# EAGLE board DO (EAGLE 9.5.0)
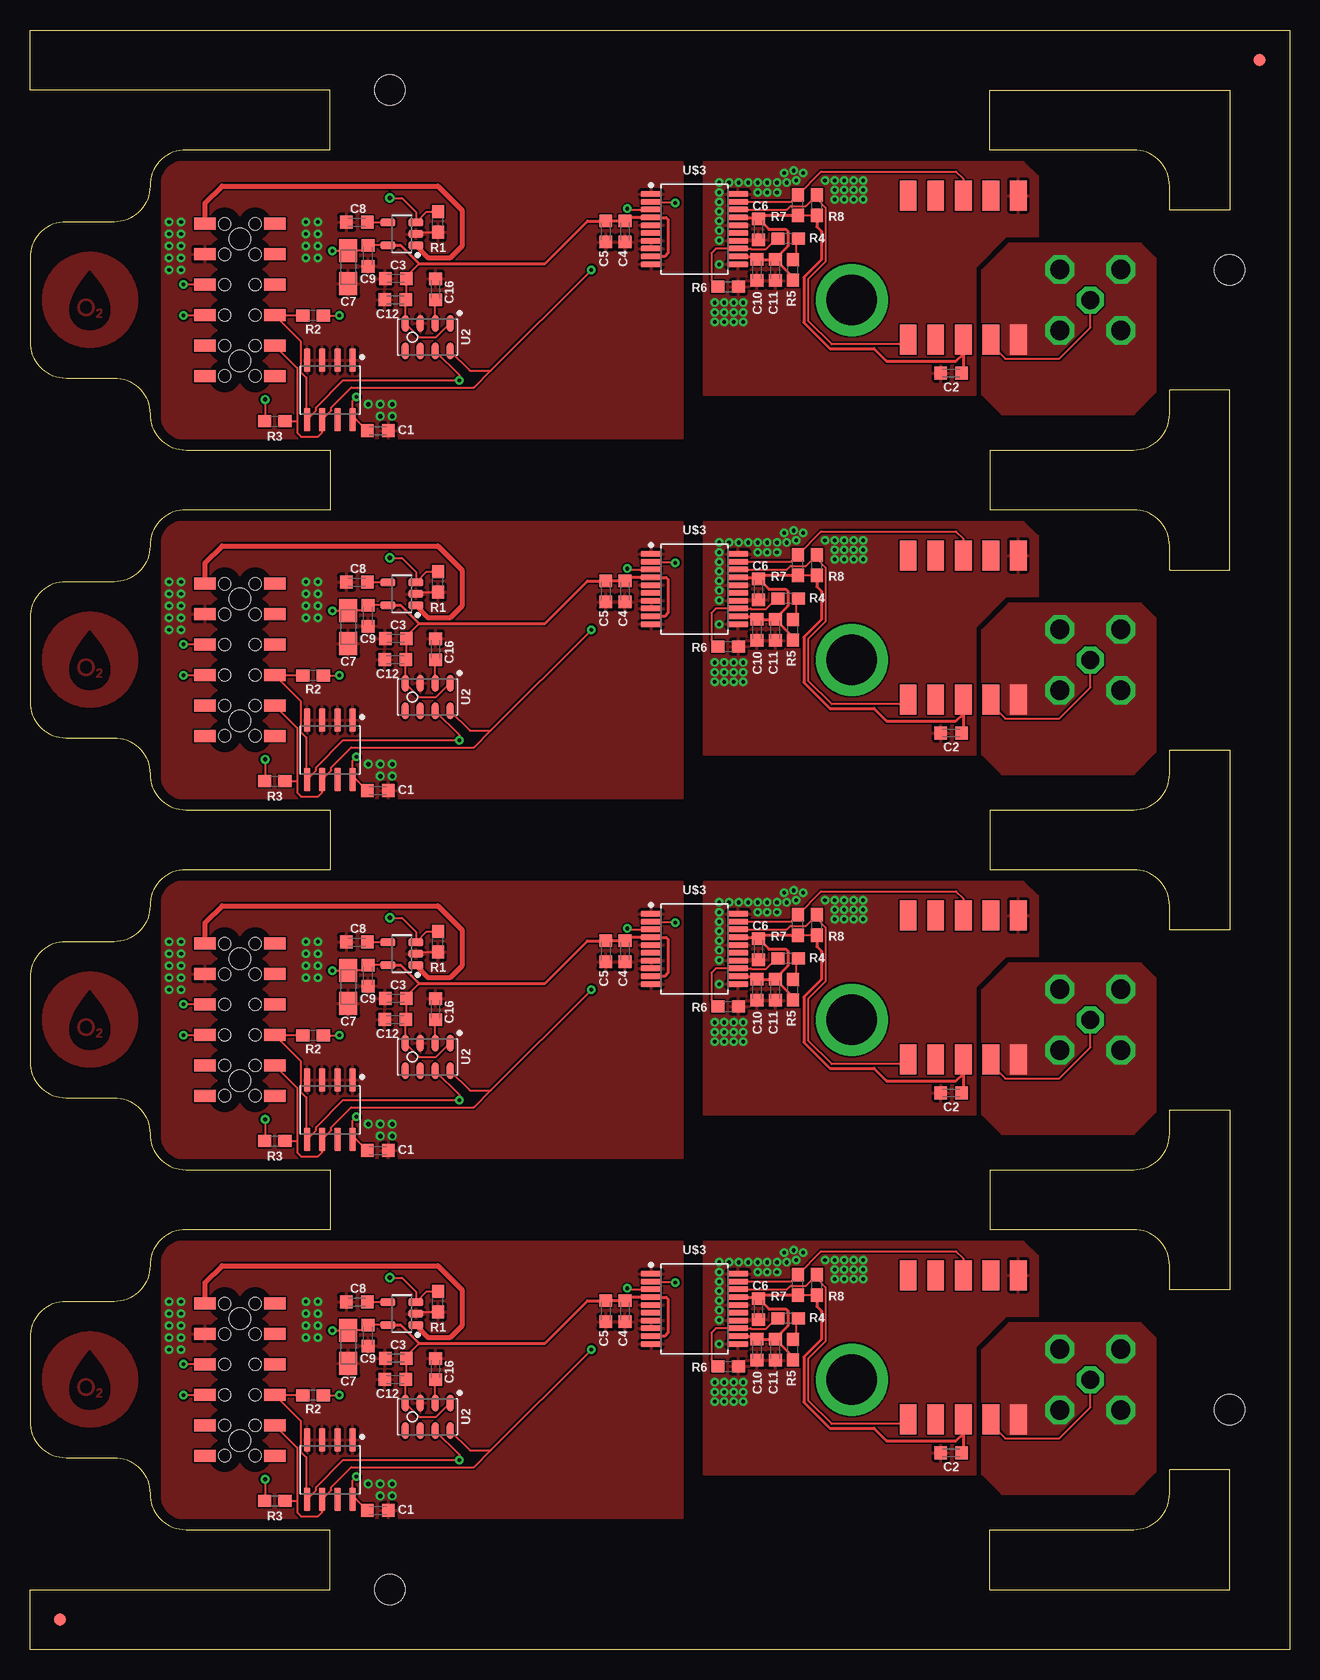
[diagram p0: board, top side]
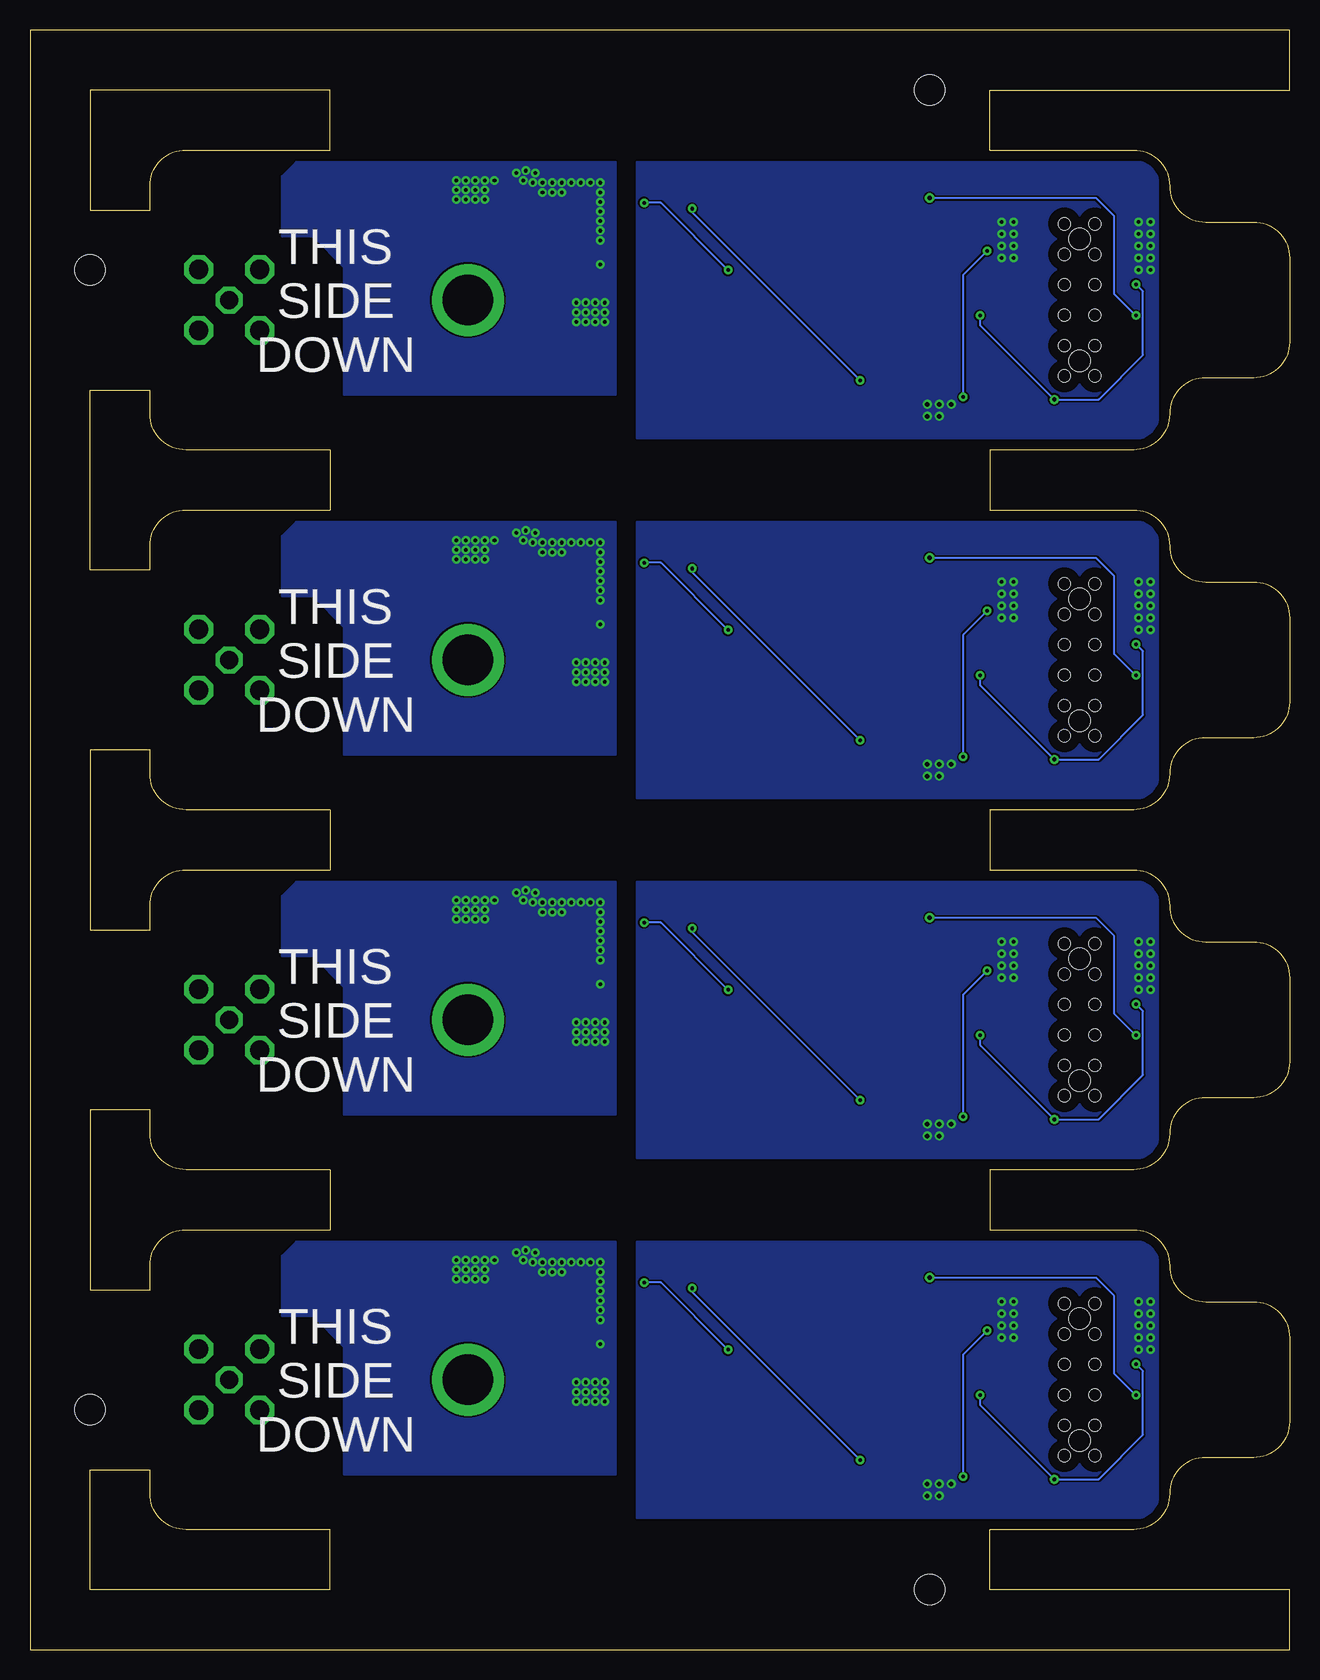
[diagram p1: board, bottom side, seen from below]

Size 105 x 135 mm. Coordinates in mm from the lower left corner, seen from the top.
Outline: 92,10 arc90 95,13 95,15 100,15 100,5 80,5 80,10 92,10
Outline: 95,32 arc90 92,35 80,35 80,40 92,40 arc90 95,43 95,45 100,45 100,30 95,30 95,32
Outline: 10,13 arc90 13,10 25,10 25,5 0,5 0,0 105,0 105,135 0,135 0,130 25,130 25,125 13,125 arc90 10,122 arc-90 7,119 3,119 arc90 0,116 0,109 arc90 3,106 7,106 arc-90 10,103 arc90 13,100 25,100 25,95 13,95 arc90 10,92 arc-90 7,89 3,89 arc90 0,86 0,79 arc90 3,76 7,76 arc-90 10,73 arc90 13,70 25,70 25,65 13,65 arc90 10,62 arc-90 7,59 3,59 arc90 0,56 0,49 arc90 3,46 7,46 arc-90 10,43 arc90 13,40 25,40 25,35 13,35 arc90 10,32 arc-90 7,29 3,29 arc90 0,26 0,19 arc90 3,16 7,16 arc-90 10,13
Outline: 95,62 arc90 92,65 80,65 80,70 92,70 arc90 95,73 95,75 100,75 100,60 95,60 95,62
Outline: 95,92 arc90 92,95 80,95 80,100 92,100 arc90 95,103 95,105 100,105 100,90 95,90 95,92
Outline: 95,122 arc90 92,125 80,125 80,130 100,130 100,120 95,120 95,122
Copper layers (1*16): Top 0.035mm / dielectric 1.5mm / Bottom 0.035mm
Design rules "default *": minimum track width 6mil, minimum drill 0.35mm, track to track 6mil, track to pad 6mil, pad to pad 6mil, via to via 6mil, smd to smd 6mil, copper to edge 32mil, drill to drill 6mil, minimum pad ring 10mil, minimum via ring 8mil, stop-mask expansion 4mil, vias tented up to drill 0.35mm, thermal gap 10mil
Holes 2.54 mm at 30,5 100,20 100,115 30,130

## Footprints (pad centres in the part's own frame; a part is rotated, then mirrored left to right if it is on the bottom)
C0603K = smd 1.05 x 1.08: 1 -0.875,0; 2 0.875,0
A/3216-18R = smd 1.95 x 1.5: + 1.375,0; - -1.375,0
FIDUCIAL_1MM = smd 1 x 1: 1 0,0
M20-7810645 = smd 1.02 x 1.78: P$1 -6.35,-2.91; P$2 -3.81,-2.91; P$3 -1.27,-2.91; P$4 1.27,-2.91; P$5 3.81,-2.91; P$6 6.35,-2.91; P$7 6.35,2.91; P$8 3.81,2.91; P$9 1.27,2.91; P$10 -1.27,2.91; P$11 -3.81,2.91; P$12 -6.35,2.91 | hole 1.02: -6.35,1.27; -3.81,1.27; -1.27,1.27; 1.27,1.27; 3.81,1.27; 6.35,1.27; 6.35,-1.27; 3.81,-1.27; 1.27,-1.27; -1.27,-1.27; -3.81,-1.27; -6.35,-1.27 | hole 1.8: -5.08,0; 5.08,0
0603 = smd 1.1 x 1: 1 -0.85,0; 2 0.85,0
SOIC127P600X175-8 = smd 1.968 x 0.569: 1 -2.473,1.905; 2 -2.473,0.635; 3 -2.473,-0.635; 4 -2.473,-1.905; 5 2.473,-1.905; 6 2.473,-0.635; 7 2.473,0.635; 8 2.473,1.905
SON125P300X500X110-8 = smd 1.412 x 0.582: 1 -1.15,1.875; 2 -1.15,0.625; 3 -1.15,-0.625; 4 -1.15,-1.875; 5 1.15,-1.875; 6 1.15,-0.625; 7 1.15,0.625; 8 1.15,1.875
5-1814832-1 = drill 1.6 octagon: G1 -2.54,2.54; G2 -2.54,-2.54; G3 2.54,-2.54; G4 2.54,2.54 | drill 1.5 octagon: PIN 0,0
ATLAS-10P = smd 2.5 x 1.4: PAD1 -6,5; PAD2 -6,2.7; PAD3 -6,0.4; PAD4 -6,-1.9; PAD5 -6,-4.2; PAD6 6,-4.2; PAD7 6,-1.9; PAD8 6,0.4; PAD9 6,2.7; PAD10 6,5
SOP65P780X200-20 = smd 1.702 x 0.475: 1 -3.603,2.925; 2 -3.603,2.275; 3 -3.603,1.625; 4 -3.603,0.975; 5 -3.603,0.325; 6 -3.603,-0.325; 7 -3.603,-0.975; 8 -3.603,-1.625; 9 -3.603,-2.275; 10 -3.603,-2.925; 11 3.603,-2.925; 12 3.603,-2.275; 13 3.603,-1.625; 14 3.603,-0.975; 15 3.603,-0.325; 16 3.603,0.325; 17 3.603,0.975; 18 3.603,1.625; 19 3.603,2.275; 20 3.603,2.925
SOT95P280X145-5 = smd 1.262 x 0.609: 1 -1.175,0.95; 2 -1.175,0; 3 -1.175,-0.95; 4 1.175,-0.95; 5 1.175,0.95

## Placement (x,y rotation side)
C1  .1uf  [C0603K]  29,101.6 0 top
C2  .1uf  [C0603K]  76.8,106.4 180 top
C3  10uf  [C0603K]  30.49,114.28 180 top
C4  .1uf  [C0603K]  49.6,118.2 270 top
C5  10uf  [C0603K]  48,118.2 270 top
C6  .1uf  [C0603K]  60.73,118.38 270 top
C7  6.8uf  [A/3216-18R]  26.54,115.23 90 top
C8  [C0603K]  27.25,118.97 180 top
C9  .1uf  [C0603K]  28.17,116.17 270 top
C10  .1uf  [C0603K]  60.6,115 270 top
C11  10uf  [C0603K]  62.13,115 270 top
C12  .1uf  [C0603K]  30.45,112.51 180 top
C13  6.8uf  [A/3216-18R]  26.54,85.23 90 top
C14  [C0603K]  27.25,88.97 180 top
C15  .1uf  [C0603K]  28.17,86.17 270 top
C16  .1uf  [C0603K]  33.81,113.38 90 top
C17  .1uf  [C0603K]  29,71.6 0 top
C18  .1uf  [C0603K]  76.8,76.4 180 top
C19  .1uf  [C0603K]  49.6,88.2 270 top
C20  10uf  [C0603K]  48,88.2 270 top
C21  .1uf  [C0603K]  60.73,88.38 270 top
C22  .1uf  [C0603K]  60.6,85 270 top
C23  10uf  [C0603K]  62.13,85 270 top
C24  10uf  [C0603K]  30.49,84.28 180 top
C25  .1uf  [C0603K]  30.45,82.51 180 top
C26  .1uf  [C0603K]  33.81,83.38 90 top
C27  6.8uf  [A/3216-18R]  26.54,55.23 90 top
C28  [C0603K]  27.25,58.97 180 top
C29  .1uf  [C0603K]  28.17,56.17 270 top
C30  .1uf  [C0603K]  29,41.6 0 top
C31  .1uf  [C0603K]  76.8,46.4 180 top
C32  .1uf  [C0603K]  49.6,58.2 270 top
C33  10uf  [C0603K]  48,58.2 270 top
C34  .1uf  [C0603K]  60.73,58.38 270 top
C35  .1uf  [C0603K]  60.6,55 270 top
C36  10uf  [C0603K]  62.13,55 270 top
C37  10uf  [C0603K]  30.49,54.28 180 top
C38  .1uf  [C0603K]  30.45,52.51 180 top
C39  .1uf  [C0603K]  33.81,53.38 90 top
C40  6.8uf  [A/3216-18R]  26.54,25.23 90 top
C41  [C0603K]  27.25,28.97 180 top
C42  .1uf  [C0603K]  28.17,26.18 270 top
C43  .1uf  [C0603K]  29,11.6 0 top
C44  .1uf  [C0603K]  76.8,16.4 180 top
C45  .1uf  [C0603K]  49.6,28.2 270 top
C46  10uf  [C0603K]  48,28.2 270 top
C47  .1uf  [C0603K]  60.73,28.38 270 top
C48  .1uf  [C0603K]  60.6,25 270 top
C49  10uf  [C0603K]  62.13,25 270 top
C50  10uf  [C0603K]  30.49,24.29 180 top
C51  .1uf  [C0603K]  30.45,22.51 180 top
C52  .1uf  [C0603K]  33.81,23.38 90 top
FID1  FIDUCIAL_1MM  [FIDUCIAL_1MM]  102.5,132.5 0 top
FID13  FIDUCIAL_1MM  [FIDUCIAL_1MM]  2.5,2.5 0 top
J1  2X6-HEADERS  [M20-7810645]  17.5,112.5 90 top
J2  2X6-HEADERS  [M20-7810645]  17.5,82.5 90 top
J3  2X6-HEADERS  [M20-7810645]  17.5,52.5 90 top
J4  2X6-HEADERS  [M20-7810645]  17.5,22.5 90 top
R1  100k  [0603]  34,119 90 top
R2  4.7k  [0603]  23.6,111.2 180 top
R3  4.7k  [0603]  20.4,102.4 0 top
R4  1.5k  [0603]  63.2,117.6 180 top
R5  1.5k  [0603]  63.6,115 90 top
R6  1.5k  [0603]  58.2,113.6 0 top
R7  4.7k  [0603]  64,120.4 90 top
R8  4.7k  [0603]  65.6,120.4 90 top
R9  100k  [0603]  34,89 90 top
R10  4.7k  [0603]  23.6,81.2 180 top
R11  4.7k  [0603]  20.4,72.4 0 top
R12  1.5k  [0603]  63.2,87.6 180 top
R13  1.5k  [0603]  63.6,85 90 top
R14  1.5k  [0603]  58.2,83.6 0 top
R15  4.7k  [0603]  64,90.4 90 top
R16  4.7k  [0603]  65.6,90.4 90 top
R17  100k  [0603]  34,59 90 top
R18  4.7k  [0603]  23.6,51.2 180 top
R19  4.7k  [0603]  20.4,42.4 0 top
R20  1.5k  [0603]  63.2,57.6 180 top
R21  1.5k  [0603]  63.6,55 90 top
R22  1.5k  [0603]  58.2,53.6 0 top
R23  4.7k  [0603]  64,60.4 90 top
R24  4.7k  [0603]  65.6,60.4 90 top
R25  100k  [0603]  34,29 90 top
R26  4.7k  [0603]  23.6,21.2 180 top
R27  4.7k  [0603]  20.4,12.4 0 top
R28  1.5k  [0603]  63.2,27.6 180 top
R29  1.5k  [0603]  63.6,25 90 top
R30  1.5k  [0603]  58.2,23.6 0 top
R31  4.7k  [0603]  64,30.4 90 top
R32  4.7k  [0603]  65.6,30.4 90 top
U1  M24C02-WMN6TP  [SOIC127P600X175-8]  25,75 270 top
U2  MPL3115A2LGA8  [SON125P300X500X110-8]  33.15,109.4 270 top
U3  M24C02-WMN6TP  [SOIC127P600X175-8]  25,105 270 top
U4  MPL3115A2LGA8  [SON125P300X500X110-8]  33.15,79.4 270 top
U5  M24C02-WMN6TP  [SOIC127P600X175-8]  25,45 270 top
U6  MPL3115A2LGA8  [SON125P300X500X110-8]  33.15,49.4 270 top
U7  M24C02-WMN6TP  [SOIC127P600X175-8]  25,15 270 top
U8  MPL3115A2LGA8  [SON125P300X500X110-8]  33.15,19.4 270 top
U$1  5-1814832-1  [5-1814832-1]  88.4,112.5 0 top
U$2  ATLAS10P  [ATLAS-10P]  78.2,115.2 90 top
U$3  ADM3260  [SOP65P780X200-20]  55.4,118.4 0 top
U$4  MIC5219-3.3YM5-TR  [SOT95P280X145-5]  31,118 180 top
U$5  MIC5219-3.3YM5-TR  [SOT95P280X145-5]  31,88 180 top
U$6  5-1814832-1  [5-1814832-1]  88.4,82.5 0 top
U$7  ATLAS10P  [ATLAS-10P]  78.2,85.2 90 top
U$8  ADM3260  [SOP65P780X200-20]  55.4,88.4 0 top
U$9  MIC5219-3.3YM5-TR  [SOT95P280X145-5]  31,58 180 top
U$10  5-1814832-1  [5-1814832-1]  88.4,52.5 0 top
U$11  ATLAS10P  [ATLAS-10P]  78.2,55.2 90 top
U$12  ADM3260  [SOP65P780X200-20]  55.4,58.4 0 top
U$13  MIC5219-3.3YM5-TR  [SOT95P280X145-5]  31,28 180 top
U$14  5-1814832-1  [5-1814832-1]  88.4,22.5 0 top
U$15  ATLAS10P  [ATLAS-10P]  78.2,25.2 90 top
U$16  ADM3260  [SOP65P780X200-20]  55.4,28.4 0 top

## Library data of the parts
C1-C52 = rcl; SPICEPREFIX: C
FID1 FID13 = microbuilder; BOM: EXCLUDE
J1-J4 U1-U8 U$1-U$16 = Conservify
R1-R32 = SparkFun-Resistors; PROD_ID: RES-07828

## Nets
3V1: C13.+ C15.1 C17.1 C19.1 C20.1 C24.1 C25.1 U1.8 U4.1 U4.4 U$5.5 U$8.4 U$8.9
3V2: C27.+ C29.1 C30.1 C32.1 C33.1 C37.1 C38.1 U5.8 U6.1 U6.4 U$9.5 U$12.4 U$12.9
3V3: C1.1 C3.1 C4.1 C5.1 C7.+ C9.1 C12.1 U2.1 U2.4 U3.8 U$3.4 U$3.9 U$4.5
3V4: C40.+ C42.1 C43.1 C45.1 C46.1 C50.1 C51.1 U7.8 U8.1 U8.4 U$13.5 U$16.4 U$16.9
CAP: C16.1 U2.2
CAP1: C26.1 U4.2
CAP2: C39.1 U6.2
CAP3: C52.1 U8.2
ENABLE: J1.P$10 R1.2 U$4.3
ENABLE1: J2.P$10 R9.2 U$5.3
ENABLE2: J3.P$10 R17.2 U$9.3
ENABLE3: J4.P$10 R25.2 U$13.3
G1: J1.P$11
G2: J1.P$12
G3: J2.P$11
G4: J2.P$12
G5: J3.P$11
G6: J3.P$12
G7: J4.P$11
G8: J4.P$12
GND: C1.2 C3.2 C4.2 C5.2 C7.- C8.2 C9.2 C12.2 C16.2 J1.P$8 R1.1 U2.3 U3.1 U3.2 U3.3 U3.4 U$3.1 U$3.5 U$3.7 U$3.8 U$3.10 U$4.2
GND2: C13.- C14.2 C15.2 C17.2 C19.2 C20.2 C24.2 C25.2 C26.2 J2.P$8 R9.1 U1.1 U1.2 U1.3 U1.4 U4.3 U$5.2 U$8.1 U$8.5 U$8.7 U$8.8 U$8.10
GND4: C27.- C28.2 C29.2 C30.2 C32.2 C33.2 C37.2 C38.2 C39.2 J3.P$8 R17.1 U5.1 U5.2 U5.3 U5.4 U6.3 U$9.2 U$12.1 U$12.5 U$12.7 U$12.8 U$12.10
GND6: C40.- C41.2 C42.2 C43.2 C45.2 C46.2 C50.2 C51.2 C52.2 J4.P$8 R25.1 U7.1 U7.2 U7.3 U7.4 U8.3 U$13.2 U$16.1 U$16.5 U$16.7 U$16.8 U$16.10
I3V1: C18.1 C21.1 C22.1 C23.1 R13.1 R15.1 R16.1 U$7.PAD3 U$8.12 U$8.17
I3V2: C31.1 C34.1 C35.1 C36.1 R21.1 R23.1 R24.1 U$11.PAD3 U$12.12 U$12.17
I3V3: C2.1 C6.1 C10.1 C11.1 R5.1 R7.1 R8.1 U$2.PAD3 U$3.12 U$3.17
I3V4: C44.1 C47.1 C48.1 C49.1 R29.1 R31.1 R32.1 U$15.PAD3 U$16.12 U$16.17
IGND: C2.2 C6.2 C10.2 C11.2 R6.2 U$2.PAD6 U$3.11 U$3.14 U$3.16 U$3.20
IGND1: C18.2 C21.2 C22.2 C23.2 R14.2 U$7.PAD6 U$8.11 U$8.14 U$8.16 U$8.20
IGND2: C31.2 C34.2 C35.2 C36.2 R22.2 U$11.PAD6 U$12.11 U$12.14 U$12.16 U$12.20
IGND3: C44.2 C47.2 C48.2 C49.2 R30.2 U$15.PAD6 U$16.11 U$16.14 U$16.16 U$16.20
IN3V1: J2.P$9 R10.1 R11.1
IN3V2: J3.P$9 R18.1 R19.1
IN3V3: J1.P$9 R2.1 R3.1
IN3V4: J4.P$9 R26.1 R27.1
ISCL: R7.2 U$2.PAD8 U$3.19
ISCL1: R15.2 U$7.PAD8 U$8.19
ISCL2: R23.2 U$11.PAD8 U$12.19
ISCL3: R31.2 U$15.PAD8 U$16.19
ISDA: R8.2 U$2.PAD1 U$3.18
ISDA1: R16.2 U$7.PAD1 U$8.18
ISDA2: R24.2 U$11.PAD1 U$12.18
ISDA3: R32.2 U$15.PAD1 U$16.18
MISO: J1.P$4
MISO1: J2.P$4
MISO2: J3.P$4
MISO3: J4.P$4
MOSI: J1.P$5
MOSI1: J2.P$5
MOSI2: J3.P$5
MOSI3: J4.P$5
N$2: U$1.PIN U$2.PAD4
N$3: R4.1 R5.2
N$5: C14.1 U$5.4
N$6: C8.1 U$4.4
N$7: U$6.PIN U$7.PAD4
N$8: R12.1 R13.2
N$10: C28.1 U$9.4
N$11: U$10.PIN U$11.PAD4
N$12: R20.1 R21.2
N$14: C41.1 U$13.4
N$15: U$14.PIN U$15.PAD4
N$16: R28.1 R29.2
NC: J1.P$1
NC1: J2.P$1
NC2: J3.P$1
NC3: J4.P$1
PG: U$1.G1 U$1.G2 U$1.G3 U$1.G4 U$2.PAD5
PG1: U$6.G1 U$6.G2 U$6.G3 U$6.G4 U$7.PAD5
PG2: U$10.G1 U$10.G2 U$10.G3 U$10.G4 U$11.PAD5
PG3: U$14.G1 U$14.G2 U$14.G3 U$14.G4 U$15.PAD5
SCK: J1.P$6
SCK1: J2.P$6
SCK2: J3.P$6
SCK3: J4.P$6
SCL: J1.P$2 R3.2 U2.8 U3.6 U$3.2
SCL1: J2.P$2 R11.2 U1.6 U4.8 U$8.2
SCL2: J3.P$2 R19.2 U5.6 U6.8 U$12.2
SCL3: J4.P$2 R27.2 U7.6 U8.8 U$16.2
SDA: J1.P$3 R2.2 U2.7 U3.5 U$3.3
SDA1: J2.P$3 R10.2 U1.5 U4.7 U$8.3
SDA2: J3.P$3 R18.2 U5.5 U6.7 U$12.3
SDA3: J4.P$3 R26.2 U7.5 U8.7 U$16.3
UNREG: J1.P$7 U$4.1
UNREG1: J2.P$7 U$5.1
UNREG2: J3.P$7 U$9.1
UNREG3: J4.P$7 U$13.1
VSEL: R4.2 R6.1 U$3.13
VSEL1: R12.2 R14.1 U$8.13
VSEL2: R20.2 R22.1 U$12.13
VSEL3: R28.2 R30.1 U$16.13
WC: U3.7
WC1: U1.7
WC2: U5.7
WC3: U7.7

## Tracks (layer width: path | path; a pad name or v marks a point on that pad's centre or on a via)
3V1  (via drill 0.3)
  Top 0.152: 29.95,87.05 U$5.5 C15.1 27.73,86.61 C13.+ v25.21,86.61 v25.2,86.6 | C17.1 27.2,72.53 | 27.2,72.53 27,72.73 | 27.2,72.53 U1.8 26.91,74.11 v27.2,74.4 | 32.45,85.52 31.37,84.44 C24.1 31.37,82.55 C25.1 31.27,82.46 U4.4 32.42,79.4 33.87,79.4 U4.1
  Top 0.254: U$8.9 52.92,86.12 53.2,86.4 53.2,89.2 53.02,89.38 U$8.4 49.9,89.38 C19.1 C20.1 46.48,89.08 42.92,85.52 32.45,85.52 30.92,87.05 U$5.5
  Bottom 0.152: v27.2,74.4 27.2,84.6 v25.2,86.6
3V2  (via drill 0.3)
  Top 0.152: 29.95,57.05 U$9.5 C29.1 27.73,56.61 C27.+ v25.21,56.61 v25.2,56.6 | C30.1 27.2,42.53 | 27.2,42.53 27,42.73 | 27.2,42.53 U5.8 26.91,44.1 v27.2,44.4 | 32.45,55.52 31.37,54.44 C37.1 31.37,52.55 C38.1 31.27,52.46 U6.4 32.42,49.4 33.87,49.4 U6.1
  Top 0.254: U$12.9 52.92,56.12 53.2,56.4 53.2,59.2 53.02,59.38 U$12.4 49.9,59.38 C32.1 C33.1 46.48,59.08 42.92,55.52 32.45,55.52 30.92,57.05 U$9.5
  Bottom 0.152: v27.2,44.4 27.2,54.6 v25.2,56.6
3V3  (via drill 0.3)
  Top 0.152: 29.95,117.05 U$4.5 C9.1 27.73,116.61 C7.+ v25.21,116.61 v25.2,116.6 | C1.1 27.2,102.53 | 27.2,102.53 27,102.73 | 27.2,102.53 U3.8 26.91,104.11 v27.2,104.4 | 32.45,115.52 31.37,114.44 C3.1 31.37,112.55 C12.1 31.27,112.46 U2.4 32.42,109.4 33.87,109.4 U2.1
  Top 0.254: U$3.9 52.92,116.12 53.2,116.4 53.2,119.2 53.02,119.38 U$3.4 49.9,119.38 C4.1 C5.1 46.48,119.08 42.92,115.52 32.45,115.52 30.92,117.05 U$4.5
  Bottom 0.152: v27.2,104.4 27.2,114.6 v25.2,116.6
3V4  (via drill 0.3)
  Top 0.152: 29.95,27.05 U$13.5 C42.1 27.73,26.61 C40.+ v25.21,26.61 v25.2,26.6 | C43.1 27.2,12.53 | 27.2,12.53 27,12.73 | 27.2,12.53 U7.8 26.91,14.11 v27.2,14.4 | 32.45,25.52 31.37,24.44 C50.1 31.37,22.55 C51.1 31.27,22.46 U8.4 32.42,19.4 33.87,19.4 U8.1
  Top 0.254: U$16.9 52.92,26.12 53.2,26.4 53.2,29.2 53.02,29.38 U$16.4 49.9,29.38 C45.1 C46.1 46.48,29.07 42.92,25.52 32.45,25.52 30.92,27.05 U$13.5
  Bottom 0.152: v27.2,14.4 27.2,24.6 v25.2,26.6
CAP
  Top 0.152: U2.2 33.77,112.47 C16.1
CAP1
  Top 0.152: U4.2 33.77,82.47 C26.1
CAP2
  Top 0.152: U6.2 33.77,52.47 C39.1
CAP3
  Top 0.152: U8.2 33.77,22.47 C52.1
ENABLE  (via drill 0.3, 0.35)
  Top 0.152: R1.2 33.08,119.85 U$4.3 32.17,119.83 31,121 v30,121 | v12.8,111.2 12.83,111.23 J1.P$10
  Bottom 0.152: v30,121 16.11,121 14.63,119.51 14.63,113.03 v12.8,111.2
ENABLE1  (via drill 0.3, 0.35)
  Top 0.152: R9.2 33.08,89.85 U$5.3 32.17,89.83 31,91 v30,91 | v12.8,81.2 12.83,81.23 J2.P$10
  Bottom 0.152: v30,91 16.11,91 14.63,89.51 14.63,83.03 v12.8,81.2
ENABLE2  (via drill 0.3, 0.35)
  Top 0.152: R17.2 33.08,59.85 U$9.3 32.17,59.83 31,61 v30,61 | v12.8,51.2 12.83,51.23 J3.P$10
  Bottom 0.152: v30,61 16.11,61 14.63,59.51 14.63,53.03 v12.8,51.2
ENABLE3  (via drill 0.3, 0.35)
  Top 0.152: R25.2 33.08,29.85 U$13.3 32.17,29.82 31,31 v30,31 | v12.8,21.2 12.83,21.23 J4.P$10
  Bottom 0.152: v30,31 16.11,31 14.63,29.51 14.63,23.03 v12.8,21.2
GND  (via drill 0.3, 0.35)
  Top 0.152: U$4.2 32.33,118.15 R1.1
  other vias: 23,119 24,119 24,118 23,118 24,117 23,117 24,116 11.6,119 11.6,118 11.6,117 11.6,116 11.6,115 12.6,119 12.6,118 12.6,117 12.6,116 12.6,115 30.2,103.8 28.2,103.8 29.2,103.8 29.2,102.8 30.2,102.8 23,116
  pour Top: 11,124 54.4,124 54.4,101 11,101
  pour Bottom: 11,124 54.4,124 54.4,101 11,101
GND1
  pour Top (rank 3): 3.26,111.91 3.27,112.01 3.28,112.11 3.3,112.21 3.33,112.31 3.39,112.51 3.47,112.72 3.56,112.92 3.66,113.13 3.89,113.54 4.16,113.96 4.45,114.36 4.91,114.95 4.93,114.97 4.95,114.98 4.97,114.99 4.99,114.99 5.01,114.99 5.02,114.99 5.03,114.98 5.05,114.97 5.06,114.97 5.07,114.95 5.82,113.96 6.08,113.55 6.32,113.13 6.42,112.92 6.51,112.72 6.59,112.51 6.65,112.31 6.68,112.21 6.7,112.11 6.71,112.01 6.73,111.88 8.96,111.88 8.99,112.1 9.01,112.3 9.01,112.51 9.01,112.71 8.99,112.92 8.97,113.12 8.93,113.31 8.89,113.51 8.83,113.7 8.77,113.88 8.7,114.07 8.62,114.24 8.53,114.42 8.43,114.58 8.33,114.75 8.22,114.9 8.1,115.06 7.97,115.2 7.84,115.34 7.7,115.47 7.56,115.6 7.4,115.72 7.25,115.83 7.08,115.93 6.92,116.03 6.74,116.12 6.57,116.2 6.38,116.27 6.2,116.33 6.01,116.39 5.81,116.43 5.62,116.47 5.42,116.49 5.21,116.51 5.01,116.51 4.8,116.51 4.6,116.49 4.4,116.47 4.2,116.43 4.01,116.39 3.82,116.33 3.63,116.27 3.45,116.2 3.27,116.12 3.1,116.03 2.93,115.93 2.77,115.83 2.61,115.72 2.46,115.6 2.31,115.47 2.17,115.34 2.04,115.2 1.92,115.06 1.8,114.9 1.68,114.75 1.58,114.58 1.48,114.42 1.39,114.24 1.31,114.07 1.24,113.88 1.18,113.7 1.13,113.51 1.08,113.31 1.05,113.12 1.02,112.92 1.01,112.71 1,112.51 1.01,112.3 1.02,112.1 1.05,111.88 3.25,111.88 3.25,111.88
  pour Top (rank 3): 6.73,111.88 6.73,111.82 6.74,111.63 6.74,111.53 6.73,111.44 6.72,111.35 6.7,111.27 6.68,111.18 6.65,111.1 6.62,111.02 6.59,110.94 6.56,110.86 6.52,110.79 6.47,110.71 6.42,110.65 6.37,110.58 6.32,110.51 6.26,110.45 6.2,110.4 6.14,110.34 6.07,110.29 6,110.24 5.93,110.19 5.86,110.15 5.78,110.11 5.7,110.08 5.62,110.05 5.54,110.02 5.45,110 5.36,109.98 5.27,109.96 5.18,109.95 5.09,109.94 4.99,109.94 4.9,109.94 4.8,109.95 4.71,109.96 4.62,109.98 4.54,110 4.45,110.02 4.37,110.05 4.28,110.08 4.2,110.11 4.13,110.15 4.05,110.19 3.98,110.24 3.91,110.29 3.84,110.34 3.78,110.4 3.72,110.45 3.66,110.51 3.61,110.58 3.56,110.65 3.51,110.72 3.47,110.79 3.43,110.86 3.39,110.94 3.36,111.02 3.33,111.1 3.3,111.18 3.28,111.27 3.27,111.36 3.25,111.44 3.25,111.53 3.24,111.63 3.25,111.81 3.25,111.88 1.05,111.88 1.08,111.7 1.13,111.51 1.18,111.32 1.24,111.13 1.32,110.95 1.39,110.77 1.48,110.6 1.58,110.43 1.68,110.27 1.8,110.11 1.91,109.96 2.04,109.81 2.17,109.67 2.31,109.54 2.46,109.41 2.61,109.3 2.77,109.18 2.93,109.08 3.1,108.98 3.27,108.89 3.45,108.82 3.63,108.74 3.82,108.68 4.01,108.63 4.2,108.58 4.4,108.55 4.6,108.52 4.8,108.51 5.01,108.5 5.21,108.51 5.42,108.52 5.62,108.55 5.81,108.58 6.01,108.63 6.2,108.68 6.38,108.74 6.57,108.82 6.74,108.89 6.92,108.98 7.08,109.08 7.25,109.18 7.4,109.3 7.56,109.41 7.7,109.54 7.84,109.67 7.97,109.81 8.1,109.96 8.22,110.11 8.33,110.27 8.43,110.43 8.53,110.6 8.62,110.77 8.7,110.95 8.77,111.13 8.83,111.32 8.89,111.51 8.93,111.7 8.96,111.88
  pour Top (rank 3): 4.15,111.91 4.15,111.96 4.16,112.02 4.18,112.07 4.19,112.12 4.22,112.17 4.24,112.21 4.27,112.25 4.31,112.29 4.34,112.32 4.39,112.35 4.43,112.38 4.48,112.4 4.53,112.42 4.58,112.43 4.64,112.43 4.67,112.43 4.73,112.43 4.78,112.42 4.84,112.41 4.88,112.39 4.93,112.36 4.97,112.34 5.01,112.31 5.05,112.27 5.08,112.23 5.11,112.19 5.13,112.14 5.16,112.09 5.17,112.04 5.18,111.99 5.19,111.94 5.19,111.88 5.39,111.88 5.39,111.88 5.39,111.96 5.38,112.03 5.36,112.1 5.34,112.17 5.31,112.23 5.27,112.29 5.23,112.35 5.19,112.4 5.14,112.45 5.08,112.49 5.03,112.52 4.96,112.55 4.89,112.58 4.82,112.6 4.78,112.6 4.71,112.61 4.63,112.61 4.55,112.6 4.52,112.6 4.45,112.58 4.38,112.55 4.31,112.52 4.28,112.51 4.23,112.47 4.2,112.45 4.15,112.4 4.11,112.35 4.07,112.29 4.05,112.26 4.01,112.2 3.99,112.13 3.98,112.1 3.96,112.03 3.95,111.96 3.95,111.88 4.15,111.88
  pour Top (rank 3): 3.95,111.8 3.96,111.73 3.98,111.66 4,111.59 4.03,111.53 4.06,111.47 4.1,111.41 4.15,111.36 4.2,111.32 4.25,111.27 4.31,111.24 4.38,111.21 4.44,111.18 4.52,111.17 4.55,111.16 4.63,111.15 4.71,111.15 4.78,111.16 4.82,111.17 4.89,111.18 4.96,111.21 5.03,111.24 5.08,111.27 5.14,111.31 5.19,111.36 5.23,111.41 5.27,111.47 5.31,111.53 5.34,111.59 5.36,111.66 5.38,111.73 5.39,111.8 5.39,111.88 5.39,111.88 5.19,111.88 5.19,111.82 5.18,111.77 5.17,111.72 5.16,111.67 5.13,111.62 5.11,111.57 5.08,111.53 5.05,111.49 5.01,111.45 4.97,111.42 4.93,111.4 4.89,111.37 4.84,111.35 4.78,111.34 4.76,111.33 4.7,111.33 4.64,111.33 4.58,111.33 4.53,111.35 4.48,111.36 4.43,111.38 4.39,111.41 4.34,111.44 4.31,111.47 4.27,111.51 4.24,111.55 4.2,111.62 4.18,111.66 4.17,111.72 4.16,111.77 4.15,111.82 4.15,111.88 3.95,111.88 3.95,111.84
  pour Top (rank 3): 6.03,111.12 5.68,111.12 5.93,111.36 5.98,111.41 6,111.45 6.01,111.47 6.02,111.49 6.03,111.54 6.03,111.58 6.02,111.62 6.01,111.64 6,111.67 5.99,111.69 5.97,111.72 5.94,111.73 5.91,111.75 5.89,111.76 5.86,111.77 5.83,111.78 5.79,111.78 5.75,111.78 5.71,111.77 5.68,111.76 5.65,111.75 5.62,111.73 5.59,111.71 5.58,111.69 5.56,111.66 5.55,111.64 5.54,111.62 5.54,111.6 5.53,111.56 5.66,111.55 5.67,111.58 5.68,111.6 5.69,111.62 5.71,111.63 5.72,111.64 5.74,111.65 5.77,111.66 5.79,111.66 5.81,111.65 5.84,111.65 5.85,111.63 5.87,111.62 5.88,111.61 5.89,111.59 5.89,111.57 5.89,111.55 5.89,111.53 5.88,111.51 5.86,111.48 5.85,111.47 5.81,111.43 5.52,111.15 5.52,111.01 6.03,111.01
GND2  (via drill 0.3, 0.35)
  Top 0.152: U$5.2 32.33,88.15 R9.1
  other vias: 23,89 24,89 24,88 23,88 24,87 23,87 24,86 11.6,89 11.6,88 11.6,87 11.6,86 11.6,85 12.6,89 12.6,88 12.6,87 12.6,86 12.6,85 30.2,73.8 28.2,73.8 29.2,73.8 29.2,72.8 30.2,72.8 23,86
  pour Top: 11,94 54.4,94 54.4,71 11,71
  pour Bottom: 11,94 54.4,94 54.4,71 11,71
GND3
  pour Top (rank 3): 3.26,81.91 3.27,82.01 3.28,82.11 3.3,82.21 3.33,82.31 3.39,82.51 3.47,82.72 3.56,82.92 3.66,83.13 3.89,83.54 4.16,83.96 4.45,84.36 4.91,84.95 4.93,84.97 4.95,84.98 4.97,84.99 4.99,84.99 5.01,84.99 5.02,84.99 5.03,84.98 5.05,84.97 5.06,84.97 5.07,84.95 5.82,83.96 6.08,83.55 6.32,83.13 6.42,82.92 6.51,82.72 6.59,82.51 6.65,82.31 6.68,82.21 6.7,82.11 6.71,82.01 6.73,81.88 8.96,81.88 8.99,82.1 9.01,82.3 9.01,82.51 9.01,82.71 8.99,82.92 8.97,83.12 8.93,83.31 8.89,83.51 8.83,83.7 8.77,83.88 8.7,84.07 8.62,84.24 8.53,84.42 8.43,84.58 8.33,84.75 8.22,84.9 8.1,85.06 7.97,85.2 7.84,85.34 7.7,85.47 7.56,85.6 7.4,85.72 7.25,85.83 7.08,85.93 6.92,86.03 6.74,86.12 6.57,86.2 6.38,86.27 6.2,86.33 6.01,86.39 5.81,86.43 5.62,86.47 5.42,86.49 5.21,86.51 5.01,86.51 4.8,86.51 4.6,86.49 4.4,86.47 4.2,86.43 4.01,86.39 3.82,86.33 3.63,86.27 3.45,86.2 3.27,86.12 3.1,86.03 2.93,85.93 2.77,85.83 2.61,85.72 2.46,85.6 2.31,85.47 2.17,85.34 2.04,85.2 1.92,85.06 1.8,84.9 1.68,84.75 1.58,84.58 1.48,84.42 1.39,84.24 1.31,84.07 1.24,83.88 1.18,83.7 1.13,83.51 1.08,83.31 1.05,83.12 1.02,82.92 1.01,82.71 1,82.51 1.01,82.3 1.02,82.1 1.05,81.88 3.25,81.88 3.25,81.88
  pour Top (rank 3): 6.73,81.88 6.73,81.82 6.74,81.63 6.74,81.53 6.73,81.44 6.72,81.35 6.7,81.27 6.68,81.18 6.65,81.1 6.62,81.02 6.59,80.94 6.56,80.86 6.52,80.79 6.47,80.71 6.42,80.65 6.37,80.58 6.32,80.51 6.26,80.45 6.2,80.4 6.14,80.34 6.07,80.29 6,80.24 5.93,80.19 5.86,80.15 5.78,80.11 5.7,80.08 5.62,80.05 5.54,80.02 5.45,80 5.36,79.98 5.27,79.96 5.18,79.95 5.09,79.94 4.99,79.94 4.9,79.94 4.8,79.95 4.71,79.96 4.62,79.98 4.54,80 4.45,80.02 4.37,80.05 4.28,80.08 4.2,80.11 4.13,80.15 4.05,80.19 3.98,80.24 3.91,80.29 3.84,80.34 3.78,80.4 3.72,80.45 3.66,80.51 3.61,80.58 3.56,80.65 3.51,80.72 3.47,80.79 3.43,80.86 3.39,80.94 3.36,81.02 3.33,81.1 3.3,81.18 3.28,81.27 3.27,81.36 3.25,81.44 3.25,81.53 3.24,81.63 3.25,81.81 3.25,81.88 1.05,81.88 1.08,81.7 1.13,81.51 1.18,81.32 1.24,81.13 1.32,80.95 1.39,80.77 1.48,80.6 1.58,80.43 1.68,80.27 1.8,80.11 1.91,79.96 2.04,79.81 2.17,79.67 2.31,79.54 2.46,79.41 2.61,79.3 2.77,79.18 2.93,79.08 3.1,78.98 3.27,78.89 3.45,78.82 3.63,78.74 3.82,78.68 4.01,78.63 4.2,78.58 4.4,78.55 4.6,78.52 4.8,78.51 5.01,78.5 5.21,78.51 5.42,78.52 5.62,78.55 5.81,78.58 6.01,78.63 6.2,78.68 6.38,78.74 6.57,78.82 6.74,78.89 6.92,78.98 7.08,79.08 7.25,79.18 7.4,79.3 7.56,79.41 7.7,79.54 7.84,79.67 7.97,79.81 8.1,79.96 8.22,80.11 8.33,80.27 8.43,80.43 8.53,80.6 8.62,80.77 8.7,80.95 8.77,81.13 8.83,81.32 8.89,81.51 8.93,81.7 8.96,81.88
  pour Top (rank 3): 4.15,81.91 4.15,81.96 4.16,82.02 4.18,82.07 4.19,82.12 4.22,82.17 4.24,82.21 4.27,82.25 4.31,82.29 4.34,82.32 4.39,82.35 4.43,82.38 4.48,82.4 4.53,82.42 4.58,82.43 4.64,82.43 4.67,82.43 4.73,82.43 4.78,82.42 4.84,82.41 4.88,82.39 4.93,82.36 4.97,82.34 5.01,82.31 5.05,82.27 5.08,82.23 5.11,82.19 5.13,82.14 5.16,82.09 5.17,82.04 5.18,81.99 5.19,81.94 5.19,81.88 5.39,81.88 5.39,81.88 5.39,81.96 5.38,82.03 5.36,82.1 5.34,82.17 5.31,82.23 5.27,82.29 5.23,82.35 5.19,82.4 5.14,82.45 5.08,82.49 5.03,82.52 4.96,82.55 4.89,82.58 4.82,82.6 4.78,82.6 4.71,82.61 4.63,82.61 4.55,82.6 4.52,82.6 4.45,82.58 4.38,82.55 4.31,82.52 4.28,82.51 4.23,82.47 4.2,82.45 4.15,82.4 4.11,82.35 4.07,82.29 4.05,82.26 4.01,82.2 3.99,82.13 3.98,82.1 3.96,82.03 3.95,81.96 3.95,81.88 4.15,81.88
  pour Top (rank 3): 3.95,81.8 3.96,81.73 3.98,81.66 4,81.59 4.03,81.53 4.06,81.47 4.1,81.41 4.15,81.36 4.2,81.32 4.25,81.27 4.31,81.24 4.38,81.21 4.44,81.18 4.52,81.17 4.55,81.16 4.63,81.15 4.71,81.15 4.78,81.16 4.82,81.17 4.89,81.18 4.96,81.21 5.03,81.24 5.08,81.27 5.14,81.31 5.19,81.36 5.23,81.41 5.27,81.47 5.31,81.53 5.34,81.59 5.36,81.66 5.38,81.73 5.39,81.8 5.39,81.88 5.39,81.88 5.19,81.88 5.19,81.82 5.18,81.77 5.17,81.72 5.16,81.67 5.13,81.62 5.11,81.57 5.08,81.53 5.05,81.49 5.01,81.45 4.97,81.42 4.93,81.4 4.89,81.37 4.84,81.35 4.78,81.34 4.76,81.33 4.7,81.33 4.64,81.33 4.58,81.33 4.53,81.35 4.48,81.36 4.43,81.38 4.39,81.41 4.34,81.44 4.31,81.47 4.27,81.51 4.24,81.55 4.2,81.62 4.18,81.66 4.17,81.72 4.16,81.77 4.15,81.82 4.15,81.88 3.95,81.88 3.95,81.84
  pour Top (rank 3): 6.03,81.12 5.68,81.12 5.93,81.36 5.98,81.41 6,81.45 6.01,81.47 6.02,81.49 6.03,81.54 6.03,81.58 6.02,81.62 6.01,81.64 6,81.67 5.99,81.69 5.97,81.72 5.94,81.73 5.91,81.75 5.89,81.76 5.86,81.77 5.83,81.78 5.79,81.78 5.75,81.78 5.71,81.77 5.68,81.76 5.65,81.75 5.62,81.73 5.59,81.71 5.58,81.69 5.56,81.66 5.55,81.64 5.54,81.62 5.54,81.6 5.53,81.56 5.66,81.55 5.67,81.58 5.68,81.6 5.69,81.62 5.71,81.63 5.72,81.64 5.74,81.65 5.77,81.66 5.79,81.66 5.81,81.65 5.84,81.65 5.85,81.63 5.87,81.62 5.88,81.61 5.89,81.59 5.89,81.57 5.89,81.55 5.89,81.53 5.88,81.51 5.86,81.48 5.85,81.47 5.81,81.43 5.52,81.15 5.52,81.01 6.03,81.01
GND4  (via drill 0.3, 0.35)
  Top 0.152: U$9.2 32.33,58.15 R17.1
  other vias: 23,59 24,59 24,58 23,58 24,57 23,57 24,56 11.6,59 11.6,58 11.6,57 11.6,56 11.6,55 12.6,59 12.6,58 12.6,57 12.6,56 12.6,55 30.2,43.8 28.2,43.8 29.2,43.8 29.2,42.8 30.2,42.8 23,56
  pour Top: 11,64 54.4,64 54.4,41 11,41
  pour Bottom: 11,64 54.4,64 54.4,41 11,41
GND5
  pour Top (rank 3): 3.26,51.91 3.27,52.01 3.28,52.11 3.3,52.21 3.33,52.31 3.39,52.51 3.47,52.72 3.56,52.92 3.66,53.13 3.89,53.54 4.16,53.96 4.45,54.36 4.91,54.95 4.93,54.97 4.95,54.98 4.97,54.99 4.99,54.99 5.01,54.99 5.02,54.99 5.03,54.98 5.05,54.97 5.06,54.97 5.07,54.95 5.82,53.96 6.08,53.55 6.32,53.13 6.42,52.92 6.51,52.72 6.59,52.51 6.65,52.31 6.68,52.21 6.7,52.11 6.71,52.01 6.73,51.88 8.96,51.88 8.99,52.1 9.01,52.3 9.01,52.51 9.01,52.71 8.99,52.92 8.97,53.12 8.93,53.31 8.89,53.51 8.83,53.7 8.77,53.88 8.7,54.07 8.62,54.24 8.53,54.42 8.43,54.58 8.33,54.75 8.22,54.9 8.1,55.06 7.97,55.2 7.84,55.34 7.7,55.47 7.56,55.6 7.4,55.72 7.25,55.83 7.08,55.93 6.92,56.03 6.74,56.12 6.57,56.2 6.38,56.27 6.2,56.33 6.01,56.39 5.81,56.43 5.62,56.47 5.42,56.49 5.21,56.51 5.01,56.51 4.8,56.51 4.6,56.49 4.4,56.47 4.2,56.43 4.01,56.39 3.82,56.33 3.63,56.27 3.45,56.2 3.27,56.12 3.1,56.03 2.93,55.93 2.77,55.83 2.61,55.72 2.46,55.6 2.31,55.47 2.17,55.34 2.04,55.2 1.92,55.06 1.8,54.9 1.68,54.75 1.58,54.58 1.48,54.42 1.39,54.24 1.31,54.07 1.24,53.88 1.18,53.7 1.13,53.51 1.08,53.31 1.05,53.12 1.02,52.92 1.01,52.71 1,52.51 1.01,52.3 1.02,52.1 1.05,51.88 3.25,51.88 3.25,51.88
  pour Top (rank 3): 6.73,51.88 6.73,51.82 6.74,51.63 6.74,51.53 6.73,51.44 6.72,51.35 6.7,51.27 6.68,51.18 6.65,51.1 6.62,51.02 6.59,50.94 6.56,50.86 6.52,50.79 6.47,50.71 6.42,50.65 6.37,50.58 6.32,50.51 6.26,50.45 6.2,50.4 6.14,50.34 6.07,50.29 6,50.24 5.93,50.19 5.86,50.15 5.78,50.11 5.7,50.08 5.62,50.05 5.54,50.02 5.45,50 5.36,49.98 5.27,49.96 5.18,49.95 5.09,49.94 4.99,49.94 4.9,49.94 4.8,49.95 4.71,49.96 4.62,49.98 4.54,50 4.45,50.02 4.37,50.05 4.28,50.08 4.2,50.11 4.13,50.15 4.05,50.19 3.98,50.24 3.91,50.29 3.84,50.34 3.78,50.4 3.72,50.45 3.66,50.51 3.61,50.58 3.56,50.65 3.51,50.72 3.47,50.79 3.43,50.86 3.39,50.94 3.36,51.02 3.33,51.1 3.3,51.18 3.28,51.27 3.27,51.36 3.25,51.44 3.25,51.53 3.24,51.63 3.25,51.81 3.25,51.88 1.05,51.88 1.08,51.7 1.13,51.51 1.18,51.32 1.24,51.13 1.32,50.95 1.39,50.77 1.48,50.6 1.58,50.43 1.68,50.27 1.8,50.11 1.91,49.96 2.04,49.81 2.17,49.67 2.31,49.54 2.46,49.41 2.61,49.3 2.77,49.18 2.93,49.08 3.1,48.98 3.27,48.89 3.45,48.82 3.63,48.74 3.82,48.68 4.01,48.63 4.2,48.58 4.4,48.55 4.6,48.52 4.8,48.51 5.01,48.5 5.21,48.51 5.42,48.52 5.62,48.55 5.81,48.58 6.01,48.63 6.2,48.68 6.38,48.74 6.57,48.82 6.74,48.89 6.92,48.98 7.08,49.08 7.25,49.18 7.4,49.3 7.56,49.41 7.7,49.54 7.84,49.67 7.97,49.81 8.1,49.96 8.22,50.11 8.33,50.27 8.43,50.43 8.53,50.6 8.62,50.77 8.7,50.95 8.77,51.13 8.83,51.32 8.89,51.51 8.93,51.7 8.96,51.88
  pour Top (rank 3): 4.15,51.91 4.15,51.96 4.16,52.02 4.18,52.07 4.19,52.12 4.22,52.17 4.24,52.21 4.27,52.25 4.31,52.29 4.34,52.32 4.39,52.35 4.43,52.38 4.48,52.4 4.53,52.42 4.58,52.43 4.64,52.43 4.67,52.43 4.73,52.43 4.78,52.42 4.84,52.41 4.88,52.39 4.93,52.36 4.97,52.34 5.01,52.31 5.05,52.27 5.08,52.23 5.11,52.19 5.13,52.14 5.16,52.09 5.17,52.04 5.18,51.99 5.19,51.94 5.19,51.88 5.39,51.88 5.39,51.88 5.39,51.96 5.38,52.03 5.36,52.1 5.34,52.17 5.31,52.23 5.27,52.29 5.23,52.35 5.19,52.4 5.14,52.45 5.08,52.49 5.03,52.52 4.96,52.55 4.89,52.58 4.82,52.6 4.78,52.6 4.71,52.61 4.63,52.61 4.55,52.6 4.52,52.6 4.45,52.58 4.38,52.55 4.31,52.52 4.28,52.51 4.23,52.47 4.2,52.45 4.15,52.4 4.11,52.35 4.07,52.29 4.05,52.26 4.01,52.2 3.99,52.13 3.98,52.1 3.96,52.03 3.95,51.96 3.95,51.88 4.15,51.88
  pour Top (rank 3): 3.95,51.8 3.96,51.73 3.98,51.66 4,51.59 4.03,51.53 4.06,51.47 4.1,51.41 4.15,51.36 4.2,51.32 4.25,51.27 4.31,51.24 4.38,51.21 4.44,51.18 4.52,51.17 4.55,51.16 4.63,51.15 4.71,51.15 4.78,51.16 4.82,51.17 4.89,51.18 4.96,51.21 5.03,51.24 5.08,51.27 5.14,51.31 5.19,51.36 5.23,51.41 5.27,51.47 5.31,51.53 5.34,51.59 5.36,51.66 5.38,51.73 5.39,51.8 5.39,51.88 5.39,51.88 5.19,51.88 5.19,51.82 5.18,51.77 5.17,51.72 5.16,51.67 5.13,51.62 5.11,51.57 5.08,51.53 5.05,51.49 5.01,51.45 4.97,51.42 4.93,51.4 4.89,51.37 4.84,51.35 4.78,51.34 4.76,51.33 4.7,51.33 4.64,51.33 4.58,51.33 4.53,51.35 4.48,51.36 4.43,51.38 4.39,51.41 4.34,51.44 4.31,51.47 4.27,51.51 4.24,51.55 4.2,51.62 4.18,51.66 4.17,51.72 4.16,51.77 4.15,51.82 4.15,51.88 3.95,51.88 3.95,51.84
  pour Top (rank 3): 6.03,51.12 5.68,51.12 5.93,51.36 5.98,51.41 6,51.45 6.01,51.47 6.02,51.49 6.03,51.54 6.03,51.58 6.02,51.62 6.01,51.64 6,51.67 5.99,51.69 5.97,51.72 5.94,51.73 5.91,51.75 5.89,51.76 5.86,51.77 5.83,51.78 5.79,51.78 5.75,51.78 5.71,51.77 5.68,51.76 5.65,51.75 5.62,51.73 5.59,51.71 5.58,51.69 5.56,51.66 5.55,51.64 5.54,51.62 5.54,51.6 5.53,51.56 5.66,51.55 5.67,51.58 5.68,51.6 5.69,51.62 5.71,51.63 5.72,51.64 5.74,51.65 5.77,51.66 5.79,51.66 5.81,51.65 5.84,51.65 5.85,51.63 5.87,51.62 5.88,51.61 5.89,51.59 5.89,51.57 5.89,51.55 5.89,51.53 5.88,51.51 5.86,51.48 5.85,51.47 5.81,51.43 5.52,51.15 5.52,51.01 6.03,51.01
GND6  (via drill 0.3, 0.35)
  Top 0.152: U$13.2 32.33,28.15 R25.1
  other vias: 23,29 24,29 24,28 23,28 24,27 23,27 24,26 11.6,29 11.6,28 11.6,27 11.6,26 11.6,25 12.6,29 12.6,28 12.6,27 12.6,26 12.6,25 30.2,13.8 28.2,13.8 29.2,13.8 29.2,12.8 30.2,12.8 23,26
  pour Top: 11,34 54.4,34 54.4,11 11,11
  pour Bottom: 11,34 54.4,34 54.4,11 11,11
GND7
  pour Top (rank 3): 3.26,21.91 3.27,22.01 3.28,22.11 3.3,22.21 3.33,22.31 3.39,22.51 3.47,22.72 3.56,22.92 3.66,23.13 3.89,23.54 4.16,23.96 4.45,24.36 4.91,24.95 4.93,24.97 4.95,24.98 4.97,24.99 4.99,24.99 5.01,24.99 5.02,24.99 5.03,24.98 5.05,24.97 5.06,24.97 5.07,24.95 5.82,23.96 6.08,23.55 6.32,23.13 6.42,22.92 6.51,22.72 6.59,22.51 6.65,22.31 6.68,22.21 6.7,22.11 6.71,22.01 6.73,21.88 8.96,21.88 8.99,22.1 9.01,22.3 9.01,22.51 9.01,22.71 8.99,22.92 8.97,23.12 8.93,23.31 8.89,23.51 8.83,23.7 8.77,23.88 8.7,24.07 8.62,24.24 8.53,24.42 8.43,24.58 8.33,24.75 8.22,24.9 8.1,25.06 7.97,25.2 7.84,25.34 7.7,25.47 7.56,25.6 7.4,25.72 7.25,25.83 7.08,25.93 6.92,26.03 6.74,26.12 6.57,26.2 6.38,26.27 6.2,26.33 6.01,26.39 5.81,26.43 5.62,26.47 5.42,26.49 5.21,26.51 5.01,26.51 4.8,26.51 4.6,26.49 4.4,26.47 4.2,26.43 4.01,26.39 3.82,26.33 3.63,26.27 3.45,26.2 3.27,26.12 3.1,26.03 2.93,25.93 2.77,25.83 2.61,25.72 2.46,25.6 2.31,25.47 2.17,25.34 2.04,25.2 1.92,25.06 1.8,24.9 1.68,24.75 1.58,24.58 1.48,24.42 1.39,24.24 1.31,24.07 1.24,23.88 1.18,23.7 1.13,23.51 1.08,23.31 1.05,23.12 1.02,22.92 1.01,22.71 1,22.51 1.01,22.3 1.02,22.1 1.05,21.88 3.25,21.88 3.25,21.88
  pour Top (rank 3): 6.73,21.88 6.73,21.82 6.74,21.63 6.74,21.53 6.73,21.44 6.72,21.35 6.7,21.27 6.68,21.18 6.65,21.1 6.62,21.02 6.59,20.94 6.56,20.86 6.52,20.79 6.47,20.71 6.42,20.65 6.37,20.58 6.32,20.51 6.26,20.45 6.2,20.4 6.14,20.34 6.07,20.29 6,20.24 5.93,20.19 5.86,20.15 5.78,20.11 5.7,20.08 5.62,20.05 5.54,20.02 5.45,20 5.36,19.98 5.27,19.96 5.18,19.95 5.09,19.94 4.99,19.94 4.9,19.94 4.8,19.95 4.71,19.96 4.62,19.98 4.54,20 4.45,20.02 4.37,20.05 4.28,20.08 4.2,20.11 4.13,20.15 4.05,20.19 3.98,20.24 3.91,20.29 3.84,20.34 3.78,20.4 3.72,20.45 3.66,20.51 3.61,20.58 3.56,20.65 3.51,20.72 3.47,20.79 3.43,20.86 3.39,20.94 3.36,21.02 3.33,21.1 3.3,21.18 3.28,21.27 3.27,21.36 3.25,21.44 3.25,21.53 3.24,21.63 3.25,21.81 3.25,21.88 1.05,21.88 1.08,21.7 1.13,21.51 1.18,21.32 1.24,21.13 1.32,20.95 1.39,20.77 1.48,20.6 1.58,20.43 1.68,20.27 1.8,20.11 1.91,19.96 2.04,19.81 2.17,19.67 2.31,19.54 2.46,19.41 2.61,19.3 2.77,19.18 2.93,19.08 3.1,18.98 3.27,18.89 3.45,18.82 3.63,18.74 3.82,18.68 4.01,18.63 4.2,18.58 4.4,18.55 4.6,18.52 4.8,18.51 5.01,18.5 5.21,18.51 5.42,18.52 5.62,18.55 5.81,18.58 6.01,18.63 6.2,18.68 6.38,18.74 6.57,18.82 6.74,18.89 6.92,18.98 7.08,19.08 7.25,19.18 7.4,19.3 7.56,19.41 7.7,19.54 7.84,19.67 7.97,19.81 8.1,19.96 8.22,20.11 8.33,20.27 8.43,20.43 8.53,20.6 8.62,20.77 8.7,20.95 8.77,21.13 8.83,21.32 8.89,21.51 8.93,21.7 8.96,21.88
  pour Top (rank 3): 4.15,21.91 4.15,21.96 4.16,22.02 4.18,22.07 4.19,22.12 4.22,22.17 4.24,22.21 4.27,22.25 4.31,22.29 4.34,22.32 4.39,22.35 4.43,22.38 4.48,22.4 4.53,22.42 4.58,22.43 4.64,22.43 4.67,22.43 4.73,22.43 4.78,22.42 4.84,22.41 4.88,22.39 4.93,22.36 4.97,22.34 5.01,22.31 5.05,22.27 5.08,22.23 5.11,22.19 5.13,22.14 5.16,22.09 5.17,22.04 5.18,21.99 5.19,21.94 5.19,21.88 5.39,21.88 5.39,21.88 5.39,21.96 5.38,22.03 5.36,22.1 5.34,22.17 5.31,22.23 5.27,22.29 5.23,22.35 5.19,22.4 5.14,22.45 5.08,22.49 5.03,22.52 4.96,22.55 4.89,22.58 4.82,22.6 4.78,22.6 4.71,22.61 4.63,22.61 4.55,22.6 4.52,22.6 4.45,22.58 4.38,22.55 4.31,22.52 4.28,22.51 4.23,22.47 4.2,22.45 4.15,22.4 4.11,22.35 4.07,22.29 4.05,22.26 4.01,22.2 3.99,22.13 3.98,22.1 3.96,22.03 3.95,21.96 3.95,21.88 4.15,21.88
  pour Top (rank 3): 3.95,21.8 3.96,21.73 3.98,21.66 4,21.59 4.03,21.53 4.06,21.47 4.1,21.41 4.15,21.36 4.2,21.32 4.25,21.27 4.31,21.24 4.38,21.21 4.44,21.18 4.52,21.17 4.55,21.16 4.63,21.15 4.71,21.15 4.78,21.16 4.82,21.17 4.89,21.18 4.96,21.21 5.03,21.24 5.08,21.27 5.14,21.31 5.19,21.36 5.23,21.41 5.27,21.47 5.31,21.53 5.34,21.59 5.36,21.66 5.38,21.73 5.39,21.8 5.39,21.88 5.39,21.88 5.19,21.88 5.19,21.82 5.18,21.77 5.17,21.72 5.16,21.67 5.13,21.62 5.11,21.57 5.08,21.53 5.05,21.49 5.01,21.45 4.97,21.42 4.93,21.4 4.89,21.37 4.84,21.35 4.78,21.34 4.76,21.33 4.7,21.33 4.64,21.33 4.58,21.33 4.53,21.35 4.48,21.36 4.43,21.38 4.39,21.41 4.34,21.44 4.31,21.47 4.27,21.51 4.24,21.55 4.2,21.62 4.18,21.66 4.17,21.72 4.16,21.77 4.15,21.82 4.15,21.88 3.95,21.88 3.95,21.84
  pour Top (rank 3): 6.03,21.12 5.68,21.12 5.93,21.36 5.98,21.41 6,21.45 6.01,21.47 6.02,21.49 6.03,21.54 6.03,21.58 6.02,21.62 6.01,21.64 6,21.67 5.99,21.69 5.97,21.72 5.94,21.73 5.91,21.75 5.89,21.76 5.86,21.77 5.83,21.78 5.79,21.78 5.75,21.78 5.71,21.77 5.68,21.76 5.65,21.75 5.62,21.73 5.59,21.71 5.58,21.69 5.56,21.66 5.55,21.64 5.54,21.62 5.54,21.6 5.53,21.56 5.66,21.55 5.67,21.58 5.68,21.6 5.69,21.62 5.71,21.63 5.72,21.64 5.74,21.65 5.77,21.66 5.79,21.66 5.81,21.65 5.84,21.65 5.85,21.63 5.87,21.62 5.88,21.61 5.89,21.59 5.89,21.57 5.89,21.55 5.89,21.53 5.88,21.51 5.86,21.48 5.85,21.47 5.81,21.43 5.52,21.15 5.52,21.01 6.03,21.01
I3V1
  Top 0.152: 63.83,89.38 R15.1 R16.1
  Top 0.254: R16.1 65.6,88.6 65.97,88.23 65.97,85.84 64.52,84.39 64.52,80.61 66.69,78.44 70.36,78.44 71.4,77.4 77.2,77.4 77.8,78 U$7.PAD3 77.8,76.53 C18.1 | U$8.12 60.35,86.12 C22.1 C23.1 | C21.1 61.6,88.38 63.02,88.38 63.18,88.22 63.18,86.98 62.13,85.93 C23.1 | C23.1 63.6,84.4 R13.1 | U$8.17 60.61,89.38 C21.1 | C21.1 61.03,89.55 R15.1
I3V2
  Top 0.152: 63.83,59.38 R23.1 R24.1
  Top 0.254: R24.1 65.6,58.6 65.97,58.23 65.97,55.84 64.52,54.38 64.52,50.62 66.69,48.44 70.36,48.44 71.4,47.4 77.2,47.4 77.8,48 U$11.PAD3 77.8,46.52 C31.1 | U$12.12 60.35,56.12 C35.1 C36.1 | C34.1 61.6,58.38 63.02,58.38 63.18,58.22 63.18,56.98 62.13,55.93 C36.1 | C36.1 63.6,54.4 R21.1 | U$12.17 60.61,59.38 C34.1 | C34.1 61.03,59.55 R23.1
I3V3
  Top 0.152: 63.83,119.38 R7.1 R8.1
  Top 0.254: R8.1 65.6,118.6 65.97,118.23 65.97,115.84 64.52,114.39 64.52,110.61 66.69,108.44 70.36,108.44 71.4,107.4 77.2,107.4 77.8,108 U$2.PAD3 77.8,106.53 C2.1 | U$3.12 60.35,116.12 C10.1 C11.1 | C6.1 61.6,118.38 63.02,118.38 63.18,118.22 63.18,116.98 62.13,115.93 C11.1 | C11.1 63.6,114.4 R5.1 | U$3.17 60.61,119.38 C6.1 | C6.1 61.03,119.55 R7.1
I3V4
  Top 0.152: 63.83,29.38 R31.1 R32.1
  Top 0.254: R32.1 65.6,28.6 65.97,28.23 65.97,25.84 64.52,24.39 64.52,20.62 66.69,18.44 70.36,18.44 71.4,17.4 77.2,17.4 77.8,18 U$15.PAD3 77.8,16.52 C44.1 | U$16.12 60.35,26.12 C48.1 C49.1 | C47.1 61.6,28.38 63.02,28.38 63.18,28.22 63.18,26.98 62.13,25.93 C49.1 | C49.1 63.6,24.4 R29.1 | U$16.17 60.61,29.38 C47.1 | C47.1 61.03,29.55 R31.1
IGND  (via drill 0.3)
  other vias: 57.47,115.47 57.47,117.47 57.47,118.27 57.47,119.07 57.47,119.87 57.47,120.67 57.47,121.47 57.07,112.27 57.87,112.27 58.67,112.27 59.47,112.27 57.07,111.47 57.87,111.47 58.67,111.47 57.07,110.67 59.47,111.47 58.27,122.27 59.07,122.27 59.87,122.27 60.67,121.47 61.47,121.47 62.27,121.47 60.67,122.27 61.47,122.27 62.27,122.27 57.47,122.27 63.07,122.27 63.87,122.47 63.67,123.27 64.47,123.07 62.87,123.07 66.27,122.47 67.07,122.47 67.87,122.47 68.67,122.47 69.47,122.47 67.07,121.67 67.87,121.67 68.67,121.67 69.47,121.67 67.07,120.87 67.87,120.87 68.67,120.87 69.47,120.87 57.87,110.67 58.67,110.67 59.47,110.67
  pour Bottom: 56.2,104.6 56.2,124 82.8,124 84,122.8 84,117.8 81.4,117.8 78.8,115.2 78.8,104.6
  pour Top: 84,117.8 84,122.8 82.8,124 56.2,124 56.2,104.6 78.8,104.6 78.8,115.2 81.4,117.8
IGND1  (via drill 0.3)
  other vias: 57.47,85.47 57.47,87.47 57.47,88.27 57.47,89.07 57.47,89.87 57.47,90.67 57.47,91.47 57.07,82.27 57.87,82.27 58.67,82.27 59.47,82.27 57.07,81.47 57.87,81.47 58.67,81.47 57.07,80.67 59.47,81.47 58.27,92.27 59.07,92.27 59.87,92.27 60.67,91.47 61.47,91.47 62.27,91.47 60.67,92.27 61.47,92.27 62.27,92.27 57.47,92.27 63.07,92.27 63.87,92.47 63.67,93.27 64.47,93.07 62.87,93.07 66.27,92.47 67.07,92.47 67.87,92.47 68.67,92.47 69.47,92.47 67.07,91.67 67.87,91.67 68.67,91.67 69.47,91.67 67.07,90.87 67.87,90.87 68.67,90.87 69.47,90.87 57.87,80.67 58.67,80.67 59.47,80.67
  pour Bottom: 56.2,74.6 56.2,94 82.8,94 84,92.8 84,87.8 81.4,87.8 78.8,85.2 78.8,74.6
  pour Top: 84,87.8 84,92.8 82.8,94 56.2,94 56.2,74.6 78.8,74.6 78.8,85.2 81.4,87.8
IGND2  (via drill 0.3)
  other vias: 57.47,55.47 57.47,57.47 57.47,58.27 57.47,59.07 57.47,59.87 57.47,60.67 57.47,61.47 57.07,52.27 57.87,52.27 58.67,52.27 59.47,52.27 57.07,51.47 57.87,51.47 58.67,51.47 57.07,50.67 59.47,51.47 58.27,62.27 59.07,62.27 59.87,62.27 60.67,61.47 61.47,61.47 62.27,61.47 60.67,62.27 61.47,62.27 62.27,62.27 57.47,62.27 63.07,62.27 63.87,62.47 63.67,63.27 64.47,63.07 62.87,63.07 66.27,62.47 67.07,62.47 67.87,62.47 68.67,62.47 69.47,62.47 67.07,61.67 67.87,61.67 68.67,61.67 69.47,61.67 67.07,60.87 67.87,60.87 68.67,60.87 69.47,60.87 57.87,50.67 58.67,50.67 59.47,50.67
  pour Bottom: 56.2,44.6 56.2,64 82.8,64 84,62.8 84,57.8 81.4,57.8 78.8,55.2 78.8,44.6
  pour Top: 84,57.8 84,62.8 82.8,64 56.2,64 56.2,44.6 78.8,44.6 78.8,55.2 81.4,57.8
IGND3  (via drill 0.3)
  other vias: 57.47,25.47 57.47,27.47 57.47,28.27 57.47,29.07 57.47,29.87 57.47,30.67 57.47,31.47 57.07,22.27 57.87,22.27 58.67,22.27 59.47,22.27 57.07,21.47 57.87,21.47 58.67,21.47 57.07,20.67 59.47,21.47 58.27,32.27 59.07,32.27 59.87,32.27 60.67,31.47 61.47,31.47 62.27,31.47 60.67,32.27 61.47,32.27 62.27,32.27 57.47,32.27 63.07,32.27 63.87,32.47 63.67,33.27 64.47,33.07 62.87,33.07 66.27,32.47 67.07,32.47 67.87,32.47 68.67,32.47 69.47,32.47 67.07,31.67 67.87,31.67 68.67,31.67 69.47,31.67 67.07,30.87 67.87,30.87 68.67,30.87 69.47,30.87 57.87,20.67 58.67,20.67 59.47,20.67
  pour Bottom: 56.2,14.6 56.2,34 82.8,34 84,32.8 84,27.8 81.4,27.8 78.8,25.2 78.8,14.6
  pour Top: 84,27.8 84,32.8 82.8,34 56.2,34 56.2,14.6 78.8,14.6 78.8,25.2 81.4,27.8
IN3V1  (via drill 0.3, 0.35)
  Top 0.152: v19.6,74.2 19.6,72.45 R11.1 | R10.1 v25.8,81.2 | v12.8,83.8 14.56,83.8 J2.P$9
  Bottom 0.152: v25.8,81.2 25.8,80.4 v19.6,74.2 15.91,74.2 12.22,77.9 12.22,83.22 v12.8,83.8
IN3V2  (via drill 0.3, 0.35)
  Top 0.152: v19.6,44.2 19.6,42.45 R19.1 | R18.1 v25.8,51.2 | v12.8,53.8 14.56,53.8 J3.P$9
  Bottom 0.152: v25.8,51.2 25.8,50.4 v19.6,44.2 15.91,44.2 12.22,47.9 12.22,53.22 v12.8,53.8
IN3V3  (via drill 0.3, 0.35)
  Top 0.152: v19.6,104.2 19.6,102.45 R3.1 | R2.1 v25.8,111.2 | v12.8,113.8 14.56,113.8 J1.P$9
  Bottom 0.152: v25.8,111.2 25.8,110.4 v19.6,104.2 15.91,104.2 12.22,107.9 12.22,113.22 v12.8,113.8
IN3V4  (via drill 0.3, 0.35)
  Top 0.152: v19.6,14.2 19.6,12.45 R27.1 | R26.1 v25.8,21.2 | v12.8,23.8 14.56,23.8 J4.P$9
  Bottom 0.152: v25.8,21.2 25.8,20.4 v19.6,14.2 15.91,14.2 12.22,17.9 12.22,23.22 v12.8,23.8
ISCL
  Top 0.152: U$3.19 63.42,120.67 R7.2 65.95,123.2 77.2,123.2 77.8,122.6 U$2.PAD8
ISCL1
  Top 0.152: U$8.19 63.42,90.67 R15.2 65.95,93.2 77.2,93.2 77.8,92.6 U$7.PAD8
ISCL2
  Top 0.152: U$12.19 63.42,60.67 R23.2 65.95,63.2 77.2,63.2 77.8,62.6 U$11.PAD8
ISCL3
  Top 0.152: U$16.19 63.42,30.68 R31.2 65.95,33.2 77.2,33.2 77.8,32.6 U$15.PAD8
ISDA
  Top 0.152: U$3.18 63.1,120.03 63.41,120.33 64.68,120.33 R8.2 65.6,120.92 66.33,120.19 66.33,115.69 64.87,114.24 64.87,110.76 66.83,108.8 72.8,108.8 U$2.PAD1
ISDA1
  Top 0.152: U$8.18 63.1,90.03 63.41,90.33 64.68,90.33 R16.2 65.6,90.92 66.33,90.19 66.33,85.69 64.87,84.24 64.87,80.76 66.83,78.8 72.8,78.8 U$7.PAD1
ISDA2
  Top 0.152: U$12.18 63.1,60.02 63.41,60.33 64.68,60.33 R24.2 65.6,60.92 66.33,60.2 66.33,55.7 64.87,54.24 64.87,50.76 66.83,48.8 72.8,48.8 U$11.PAD1
ISDA3
  Top 0.152: U$16.18 63.1,30.02 63.41,30.33 64.68,30.33 R32.2 65.6,30.92 66.33,30.2 66.33,25.7 64.87,24.24 64.87,20.76 66.83,18.8 72.8,18.8 U$15.PAD1
N$1  (via drill 4.2 pad 6)
  other vias: 68.5,112.5
N$2
  Top 0.152: U$2.PAD4 80.1,108.8 81.3,107.6 85.8,107.6 88.4,110.2 U$1.PIN
N$3
  Top 0.152: R4.1 63.85,117.4 63.85,116.1 R5.2
N$4  (via drill 4.2 pad 6)
  other vias: 68.5,82.5
N$5
  Top 0.152: C14.1 29.81,88.97 U$5.4
N$6
  Top 0.152: C8.1 29.81,118.97 U$4.4
N$7
  Top 0.152: U$7.PAD4 80.1,78.8 81.3,77.6 85.8,77.6 88.4,80.2 U$6.PIN
N$8
  Top 0.152: R12.1 63.85,87.4 63.85,86.1 R13.2
N$9  (via drill 4.2 pad 6)
  other vias: 68.5,52.5
N$10
  Top 0.152: C28.1 29.81,58.97 U$9.4
N$11
  Top 0.152: U$11.PAD4 80.1,48.8 81.3,47.6 85.8,47.6 88.4,50.2 U$10.PIN
N$12
  Top 0.152: R20.1 63.85,57.4 63.85,56.1 R21.2
N$13  (via drill 4.2 pad 6)
  other vias: 68.5,22.5
N$14
  Top 0.152: C41.1 29.81,28.97 U$13.4
N$15
  Top 0.152: U$15.PAD4 80.1,18.8 81.3,17.6 85.8,17.6 88.4,20.2 U$14.PIN
N$16
  Top 0.152: R28.1 63.85,27.4 63.85,26.1 R29.2
PG
  pour Top (no thermals): 79.4,104.6 79.4,115 81.6,117.2 92.6,117.2 93.8,116 93.8,104.8 92,103 81,103
PG1
  pour Top (no thermals): 79.4,74.6 79.4,85 81.6,87.2 92.6,87.2 93.8,86 93.8,74.8 92,73 81,73
PG2
  pour Top (no thermals): 79.4,44.6 79.4,55 81.6,57.2 92.6,57.2 93.8,56 93.8,44.8 92,43 81,43
PG3
  pour Top (no thermals): 79.4,14.6 79.4,25 81.6,27.2 92.6,27.2 93.8,26 93.8,14.8 92,13 81,13
SCL  (via drill 0.3)
  Top 0.152: J1.P$2 22.28,106.82 22.28,102.42 | 22.28,102.42 22.28,101.42 22.6,101.1 22.6,101.09 24,101.09 24.36,101.46 U3.6 25.12,103.28 25.12,103.54 26.78,105.2 37,105.2 38.4,106.6 | R3.2 22.26,102.4 22.28,102.42 | 38.4,106.6 v46.8,115 | v53.8,120.6 51.87,120.6 U$3.2 | U2.8 36.67,106.6 38.4,106.6
  Bottom 0.152: v46.8,115 52.4,120.6 v53.8,120.6
SCL1  (via drill 0.3)
  Top 0.152: J2.P$2 22.28,76.82 22.28,72.42 | 22.28,72.42 22.28,71.42 22.6,71.1 22.6,71.09 24,71.09 24.36,71.46 U1.6 25.12,73.28 25.12,73.54 26.78,75.2 37,75.2 38.4,76.6 | R11.2 22.26,72.4 22.28,72.42 | 38.4,76.6 v46.8,85 | v53.8,90.6 51.87,90.6 U$8.2 | U4.8 36.67,76.6 38.4,76.6
  Bottom 0.152: v46.8,85 52.4,90.6 v53.8,90.6
SCL2  (via drill 0.3)
  Top 0.152: J3.P$2 22.28,46.82 22.28,42.42 | 22.28,42.42 22.28,41.42 22.6,41.1 22.6,41.09 24,41.09 24.36,41.46 U5.6 25.12,43.28 25.12,43.54 26.78,45.2 37,45.2 38.4,46.6 | R19.2 22.26,42.4 22.28,42.42 | 38.4,46.6 v46.8,55 | v53.8,60.6 51.87,60.6 U$12.2 | U6.8 36.67,46.6 38.4,46.6
  Bottom 0.152: v46.8,55 52.4,60.6 v53.8,60.6
SCL3  (via drill 0.3)
  Top 0.152: J4.P$2 22.28,16.82 22.28,12.42 | 22.28,12.42 22.28,11.42 22.6,11.1 22.6,11.09 24,11.09 24.36,11.46 U7.6 25.12,13.28 25.12,13.54 26.78,15.2 37,15.2 38.4,16.6 | R27.2 22.26,12.4 22.28,12.42 | 38.4,16.6 v46.8,25 | v53.8,30.6 51.87,30.6 U$16.2 | U8.8 36.67,16.6 38.4,16.6
  Bottom 0.152: v46.8,25 52.4,30.6 v53.8,30.6
SDA  (via drill 0.3)
  Top 0.152: R2.2 22.72,111.23 J1.P$3 22.58,109.06 22.58,106.46 23.02,106.02 23.02,102.6 U3.5 23.85,103.28 23.85,103.54 26.11,105.8 v35.8,105.8 35.8,106.22 U2.7 | v49.8,120.11 49.88,120.03 U$3.3
  Bottom 0.152: v35.8,105.8 49.8,119.8 v49.8,120.11
SDA1  (via drill 0.3)
  Top 0.152: R10.2 22.72,81.23 J2.P$3 22.58,79.06 22.58,76.46 23.02,76.02 23.02,72.6 U1.5 23.85,73.28 23.85,73.54 26.11,75.8 v35.8,75.8 35.8,76.22 U4.7 | v49.8,90.11 49.88,90.03 U$8.3
  Bottom 0.152: v35.8,75.8 49.8,89.8 v49.8,90.11
SDA2  (via drill 0.3)
  Top 0.152: R18.2 22.72,51.23 J3.P$3 22.58,49.06 22.58,46.46 23.02,46.02 23.02,42.6 U5.5 23.85,43.28 23.85,43.54 26.11,45.8 v35.8,45.8 35.8,46.22 U6.7 | v49.8,60.11 49.88,60.02 U$12.3
  Bottom 0.152: v35.8,45.8 49.8,59.8 v49.8,60.11
SDA3  (via drill 0.3)
  Top 0.152: R26.2 22.72,21.23 J4.P$3 22.58,19.06 22.58,16.46 23.02,16.02 23.02,12.6 U7.5 23.85,13.28 23.85,13.54 26.11,15.8 v35.8,15.8 35.8,16.22 U8.7 | v49.8,30.11 49.88,30.02 U$16.3
  Bottom 0.152: v35.8,15.8 49.8,29.8 v49.8,30.11
UNREG
  Top 0.406: J1.P$7 14.59,120.59 16,122 34,122 36,120 36,117 35,116 33.23,116 U$4.1
UNREG1
  Top 0.406: J2.P$7 14.59,90.59 16,92 34,92 36,90 36,87 35,86 33.23,86 U$5.1
UNREG2
  Top 0.406: J3.P$7 14.59,60.59 16,62 34,62 36,60 36,57 35,56 33.23,56 U$9.1
UNREG3
  Top 0.406: J4.P$7 14.59,30.59 16,32 34,32 36,30 36,27 35,26 33.23,26 U$13.1
VSEL
  Top 0.152: R4.2 62.22,117.6 61.37,116.75 60.1,116.75 60.07,116.78 U$3.13 57.17,116.78 56.8,116.4 56.8,114.15 R6.1
VSEL1
  Top 0.152: R12.2 62.22,87.6 61.37,86.75 60.1,86.75 60.07,86.78 U$8.13 57.17,86.78 56.8,86.4 56.8,84.15 R14.1
VSEL2
  Top 0.152: R20.2 62.22,57.6 61.37,56.75 60.1,56.75 60.07,56.77 U$12.13 57.17,56.77 56.8,56.4 56.8,54.15 R22.1
VSEL3
  Top 0.152: R28.2 62.22,27.6 61.37,26.75 60.1,26.75 60.07,26.77 U$16.13 57.17,26.77 56.8,26.4 56.8,24.15 R30.1

## Text on the board
bPlace: THIS / SIDE / DOWN | THIS / SIDE / DOWN | THIS / SIDE / DOWN | THIS / SIDE / DOWN
tNames: U$3 | C8 | C6 | R7 | R8 | R4 | R1 | C5 | C4 | C9 | C3 | C16 | C7 | R6 | C10 | C11 | R5 | C12 | R2 | U2 | C2 | R3 | C1 | U$3 | C8 | C6 | R7 | R8 | R4 | R1 | C5 | C4 | C9 | C3 | C16 | C7 | R6 | C10 | C11 | R5 | C12 | R2 | U2 | C2 | R3 | C1 | U$3 | C8 | C6 | R7 | R8 | R4 | R1 | C5 | C4 | C9 | C3 | C16 | C7 | R6 | C10 | C11 | R5 | C12 | R2 | U2 | C2 | R3 | C1 | U$3 | C8 | C6 | R7 | R8 | R4 | R1 | C5 | C4 | C9 | C3 | C16 | C7 | R6 | C10 | C11 | R5 | C12 | R2 | U2 | C2 | R3 | C1